# Altium PCB fpga_v3.PcbDoc (part 3 of 3)
Units mm, origin at the board's own origin, x right, y up, seen from the top; angles counter-clockwise.
Board outline 160 x 147 mm, 2 copper layers (Top Layer, Bottom Layer); 241 components, 277 nets, 981 pads, 212 vias.
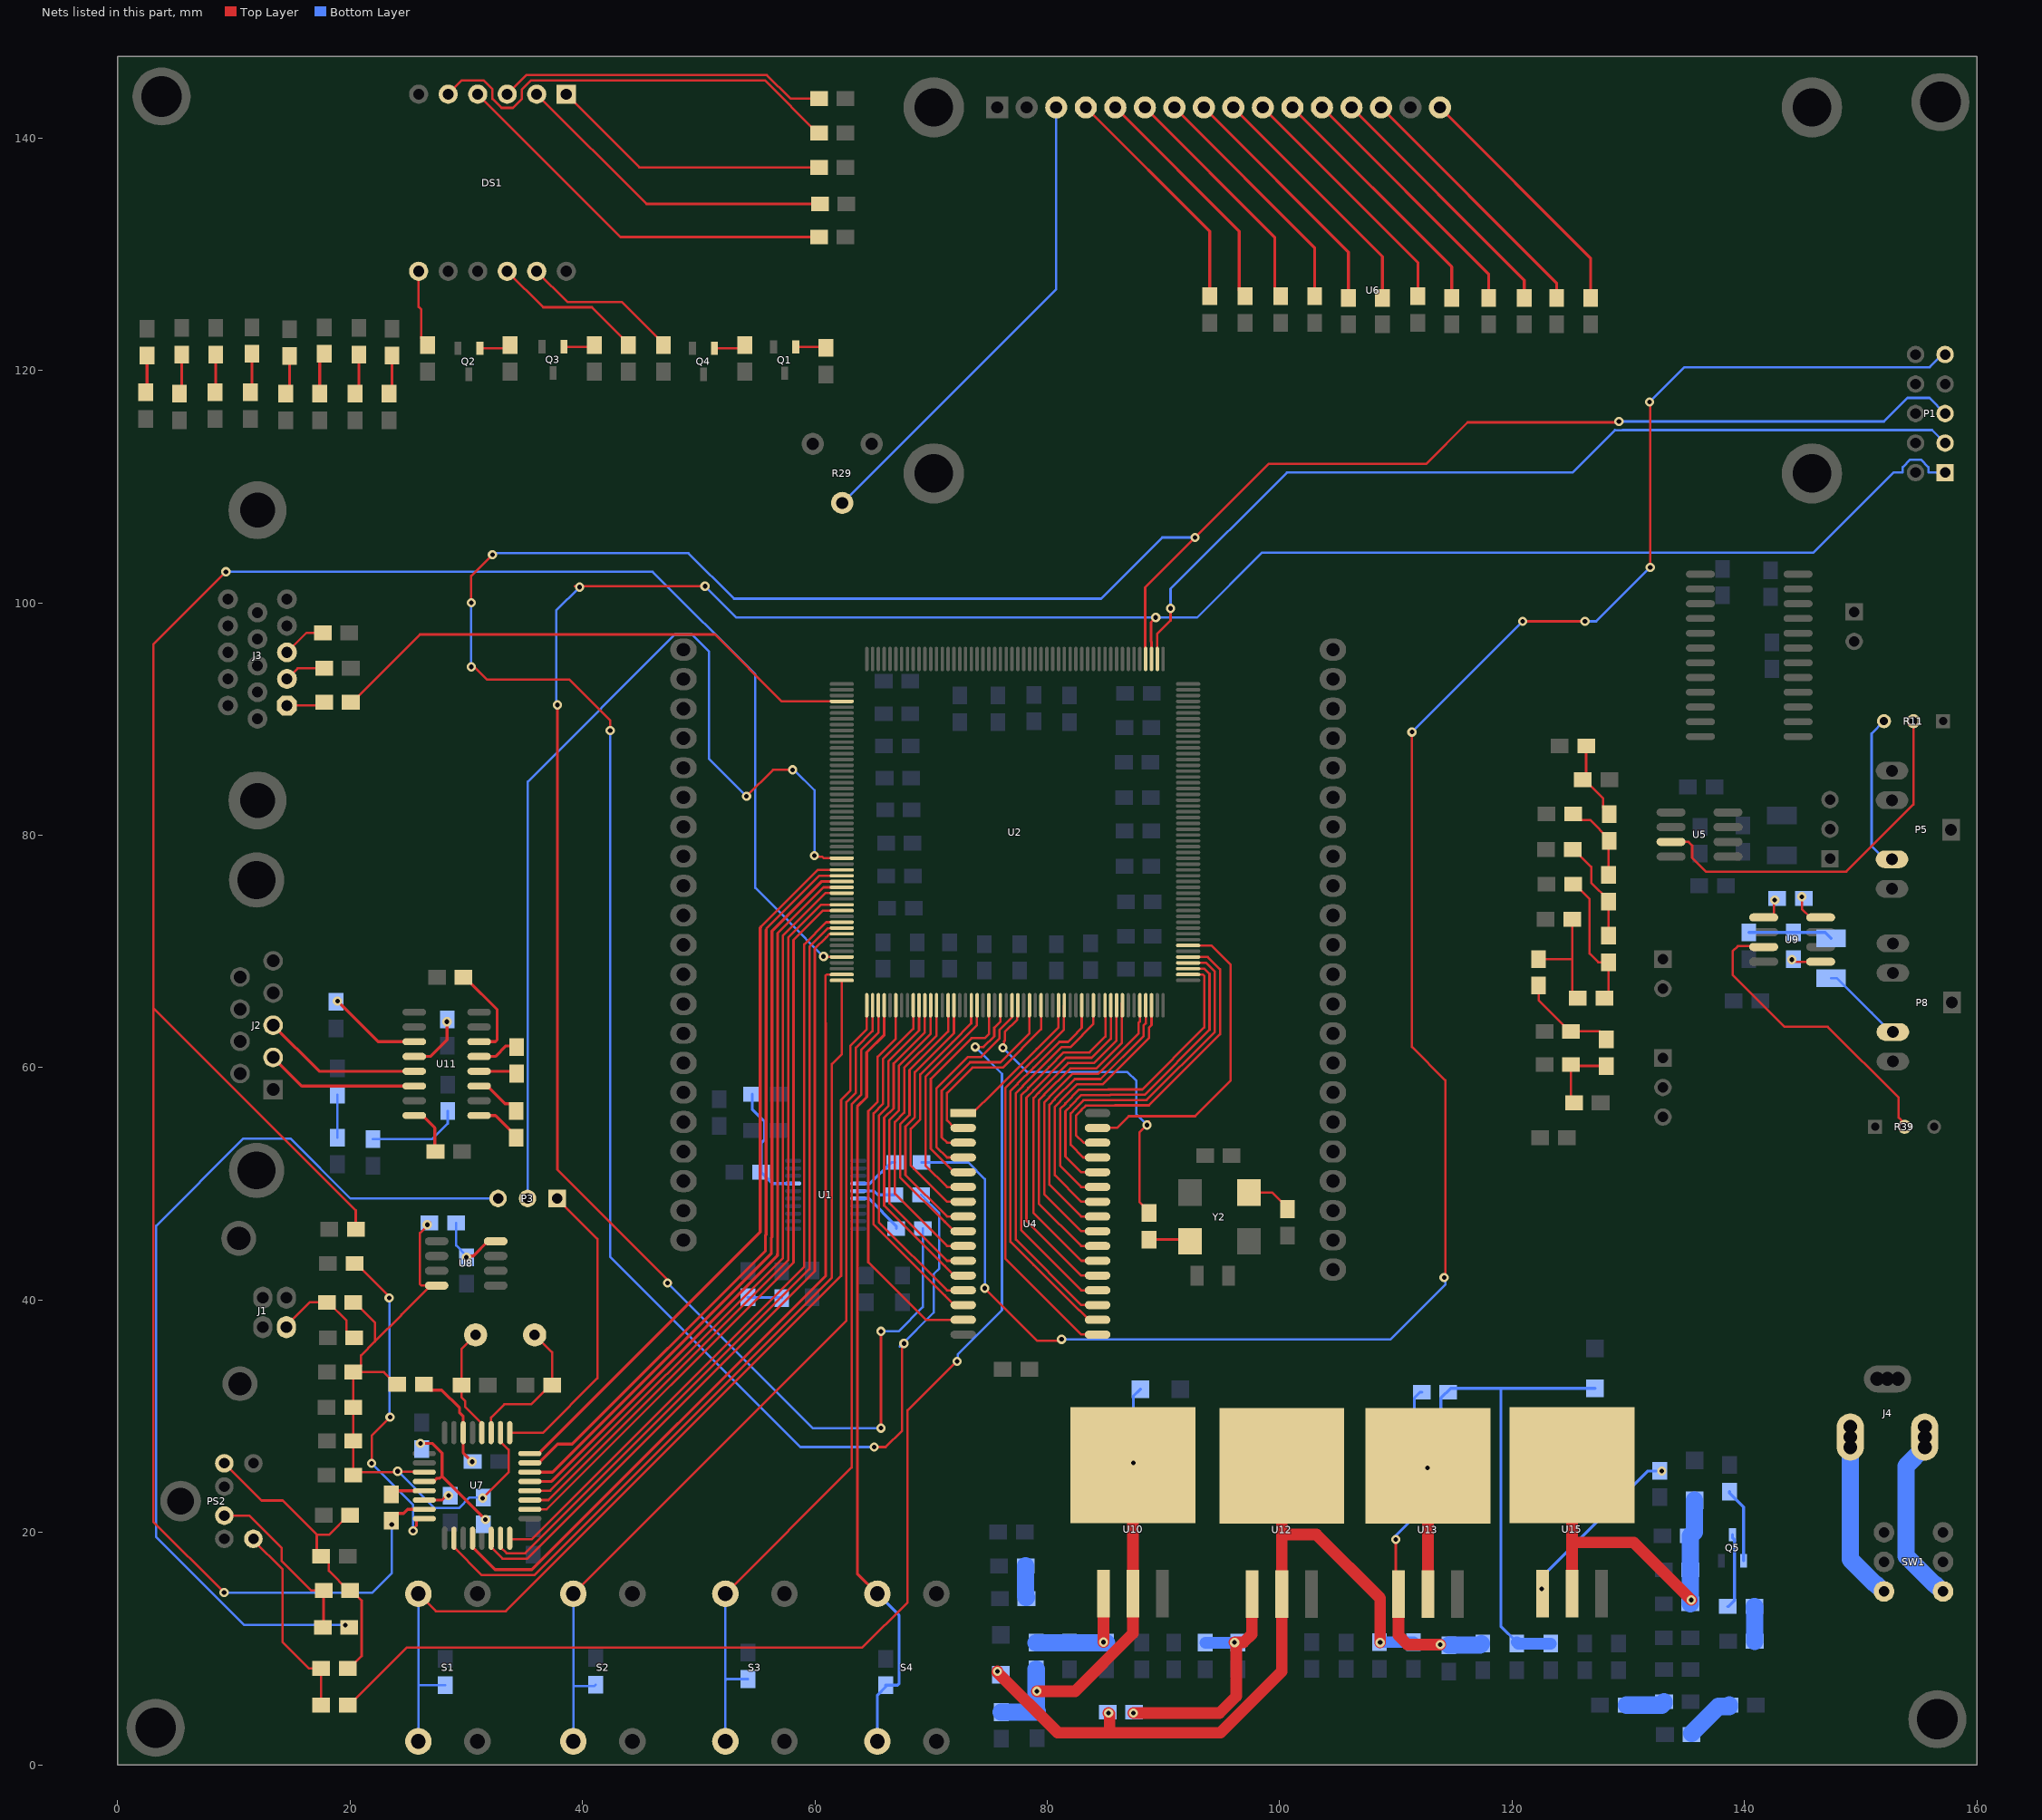
[diagram p3: the nets of this part, all layers, seen from the top]

## Via types
v1: diameter 0.8, hole 0.4, Top Layer to Bottom Layer, 210 vias
v2: diameter 1.27, hole 0.711, Top Layer to Bottom Layer, 2 vias

## Nets (pads, with @x,y where several pads share a name; then routed paths per layer and width w, separated by ;. In a path a pad name is that pad's centre, name@x,y a point inside that pad or via, vN(x,y) a via of type N, cw(c..) or ccw(c..) an arc to the next point about the centre after c; other vN are vias at no path point) (continued)
NetC29_2: C29.2 U7.6 | length 2.2
  Top Layer w0.254: U7.6@26.391,22.795 27.931,22.795 28.327,23.191 v1(28.474,23.191)
NetC30_1: C30.1 J1.1 L2.1 | length 8.6
  Top Layer w0.203: J1.1@14.529,37.668 14.529,37.795 16.535,39.802 18.136,39.802 19.71,38.227 19.71,37.287 20.244,36.754 C30.1@20.371,36.754
NetC31_2: C31.2 U7.27 Y1.2 | length 12.6
  Top Layer w0.203: U7.27@32.145,28.599 32.145,29.904 33.271,31.03 35.602,31.03 37.262,32.69 C31.2@37.389,32.69 37.389,35.509 Y1.2@35.89,37.008
NetC35_1: C35.1 U9.5 | length 2.5
  Top Layer w0.203: v1(144.069,69.291) 144.23,69.291 144.408,69.113 U9.5@146.544,69.113
NetC35_2: C35.2 C36.1 R38.2 | length 7.3
  Bottom Layer w0.254: R38.2@140.36,71.628 146.939,71.628 C36.1@147.447,71.12
NetC36_2: C36.2 P8.4 | length 7.2
  Bottom Layer w0.203: C36.2@147.447,67.691 147.955,67.691 150.927,64.719 152.578,63.068 P8.4@152.756,63.068
NetC37_2: C37.2 U7.28 Y1.1 | length 9.6
  Top Layer w0.203: Y1.1@30.81,37.008 29.591,35.789 29.591,31.642 29.91,31.323 29.91,30.809 31.345,29.374 U7.28@31.345,28.599
NetC38_1: C38.1 U9.1 | length 2.1
  Top Layer w0.203: U9.1@141.644,72.923 142.29,72.923 142.519,73.153 v1@142.519,74.32
  other v1: 142.596,74.422
NetC38_2: C38.2 U9.8 | length 3.2
  Top Layer w0.203: v1@144.932,74.879 144.932,73.635 145.644,72.923 U9.8@146.544,72.923
  other v1: 144.932,74.707
NetC39_1: C39.1 R40.1 U7.30 | length 9
  Top Layer w0.254: R40.1@26.365,32.766 26.873,32.258 27.888,32.258 29.427,30.718 29.427,30.298 29.745,29.98 29.745,26.846 v1(30.505,26.086)
NetC43_1: C43.1 C44.1 L5.1 R61.1 U10.2 | length 38.3
  Top Layer w1: v1(79.1,6.35) 82.393,6.35 87.376,11.333 U10.2@87.376,14.757 U10.2@87.376,25.792
  Bottom Layer w0.254: v1@87.401,25.73 v1(87.401,25.984) 87.401,31.725 L5.1@88.011,32.334
  Bottom Layer w1.5: C44.1@76.048,4.547 78.967,4.547 C43.1@79.006,4.585 ; R61.1@79.045,8.23 79.045,4.609 79.057,4.597 C43.1@79.121,4.597
NetC45_1: C45.1 R61.2 R63.2 U10.1 | length 10.3
  Top Layer w0.203: v1@84.811,10.541 v1(84.836,10.566)
  Top Layer w1: v1(84.836,10.566) U10.1@84.836,14.757
  Bottom Layer w1.5: R61.2@79.045,10.516 C45.1@85.09,10.516
NetC46_1: C46.1 U11.16 | length 4.3
  Top Layer w0.254: U11.16@25.527,55.88 26.238,55.88 27.305,54.813 C46.1@27.305,52.781
NetC47_1: C47.1 U11.1 | length 4.2
  Top Layer w0.254: U11.1@31.115,55.88 32.512,55.88 34.468,53.924 C47.1@34.468,53.899
NetC47_2: C47.2 U11.3 | length 4.2
  Top Layer w0.254: U11.3@31.115,58.42 31.826,58.42 33.35,56.896 33.782,56.896 34.29,56.388 C47.2@34.29,56.236
NetC48_1: C48.1 U11.4 | length 2.9
  Top Layer w0.254: U11.4@31.115,59.69 C48.1@34.061,59.69
NetC48_2: C48.2 U11.5 | length 3.2
  Top Layer w0.254: U11.5@31.115,60.96 32.512,60.96 33.426,61.874 C48.2@33.985,61.874
NetC51_1: C51.1 C52.1 L6.1 R77.1 U12.2 | length 65.9
  Top Layer w0.254: U12.2@100.178,21.996 U12.2@100.178,25.742
  Top Layer w1: v1(75.717,8.052) 75.717,7.959 80.908,2.769 85.357,2.769 ; v1(85.274,4.464) 85.357,4.381 85.357,2.769 ; U12.2@100.178,21.996 100.178,20.015 ; v1(108.636,10.541) 108.636,14.351 103.149,19.837 100.355,19.837 100.178,20.015 ; 85.357,2.769 94.885,2.769 100.178,8.061 U12.2@100.178,14.707 100.178,20.015
  Bottom Layer w0.203: C51.1@108.585,10.566 C51.1@108.661,10.566
  Bottom Layer w1: v1(108.636,10.541) 108.661,10.566 C52.1@111.506,10.566
NetC53_1: C53.1 R77.2 R80.2 U12.1 | length 22.2
  Top Layer w1: v1(87.401,4.47) 94.814,4.47 96.25,5.907 96.25,10.405 v1(96.114,10.541) 96.876,10.541 97.598,11.263 97.598,14.667 U12.1@97.638,14.707
  Bottom Layer w0.203: v1(96.114,10.541) 96.139,10.516 R80.2@96.393,10.516
  Bottom Layer w1: C53.1@93.599,10.516 96.088,10.516 v1(96.114,10.541)
NetC54_2: C54.2 U11.6 | length 7.9
  Top Layer w0.254: C54.2@30.074,67.589 32.661,65.002 32.661,62.379 32.512,62.23 U11.6@31.115,62.23
NetC58_1: C58.1 C59.1 L7.1 R84.1 U13.2 | length 56.6
  Top Layer w0.254: U13.2@112.751,25.527 U13.2@112.751,25.742
  Top Layer w1: v1(112.725,25.552) 112.751,25.527 U13.2@112.751,14.707
  Bottom Layer w0.254: v1(112.725,25.552) 113.868,26.695 113.868,31.572 114.706,32.41 119.024,32.41 ; C59.1@120.396,10.566 119.024,11.938 119.024,32.41 ; L7.1@127.127,32.41 119.024,32.41
  Bottom Layer w1: C59.1@120.396,10.566 120.523,10.439 C58.1@123.317,10.439
NetC62_1: C62.1 R84.2 R88.2 U13.1 | length 29.1
  Top Layer w0.203: v1@110.084,19.66 v1@110.211,19.533
  Top Layer w0.254: U13.1@110.211,14.935 109.982,15.164 109.982,19.304 v1@110.211,19.533 ; v1(113.817,10.363) v1@114.173,10.363
  Top Layer w1: U13.1@110.211,14.707 110.211,11.151 110.998,10.363 v1(113.817,10.363)
  Bottom Layer w0.254: v1@109.906,19.66 111.582,21.336 111.582,31.572 112.09,32.08 R84.2@112.217,32.08
  Bottom Layer w1.5: C62.1@114.554,10.312 117.245,10.312 R88.2@117.36,10.427
  other v1: 109.982,19.406
NetC70_1: C70.1 C71.1 L9.1 R102.1 U15.2 | length 32.4
  Top Layer w1: U15.2@125.146,14.757 125.146,19.152 ; U15.2@125.146,25.792 125.146,19.152 ; v1(135.407,14.199) 130.454,19.152 125.146,19.152
  Bottom Layer w1.5: R102.1@135.331,13.868 C70.1@135.331,16.789 135.331,19.71 135.675,20.054 135.675,22.772 L9.1@135.687,22.784
NetD1_1: D1.1 R9.1 | length 2.9
  Bottom Layer w0.254: D1.1@54.241,40.234 57.099,40.234 R9.1@57.15,40.183
NetD2_2: D2.2 R62.2 | length 3.4
  Bottom Layer w1.5: R62.2@129.845,5.156 132.882,5.156 133.071,5.345 D2.2@133.071,5.448
NetD3_1: D3.1 R66.2 | length 3.2
  Top Layer w0.254: R66.2@2.413,118.11 2.54,118.237 D3.1@2.54,121.285
NetD4_1: D4.1 R67.2 | length 3.5
  Top Layer w0.254: R67.2@5.334,117.983 5.525,118.174 D4.1@5.525,121.361
NetD5_1: D5.1 R68.2 | length 3.3
  Top Layer w0.254: R68.2@8.382,118.11 8.446,118.174 D5.1@8.446,121.361
NetD6_1: D6.1 R69.2 | length 3.4
  Top Layer w0.254: R69.2@11.43,118.11 11.557,118.237 D6.1@11.557,121.412
NetD7_1: D7.1 R70.2 | length 3.4
  Top Layer w0.254: R70.2@14.478,117.983 14.796,118.301 D7.1@14.796,121.234
NetD8_1: D8.1 R71.2 | length 3.6
  Top Layer w0.254: R71.2@17.399,117.983 17.399,121.031 D8.1@17.78,121.412
NetD9_1: D9.1 R72.2 | length 3.5
  Top Layer w0.254: R72.2@20.447,117.983 20.765,118.301 D9.1@20.765,121.361
NetD10_1: D10.1 R73.2 | length 3.4
  Top Layer w0.254: R73.2@23.368,117.983 23.622,118.237 D10.1@23.622,121.285
NetD11_2: D11.2 R78.2 | length 2.7
  Bottom Layer w1.5: R78.2@78.13,17.12 78.13,14.492 D11.2@78.195,14.428
NetD13_2: D13.2 R85.2 | length 4.3
  Bottom Layer w1.5: R85.2@135.445,2.731 137.742,5.028 138.672,5.028 138.684,5.04 D13.2@138.684,5.143
NetD14_1: D14.1 R92.2 | length 3.7
  Bottom Layer w0.203: R92.2@18.923,53.975 D14.1@18.923,57.658
NetD15_1: D15.1 R96.2 | length 8.1
  Bottom Layer w0.203: R96.2@21.971,53.848 27.063,53.848 28.41,55.194 D15.1@28.41,56.261
NetD17_2: D17.2 R104.1 | length 3
  Bottom Layer w1.5: R104.1@140.843,13.64 140.855,13.628 140.855,13.501 140.868,13.487 D17.2@140.868,10.656
NetDS1_1: DS1.1 R56.1 | length 24.4
  Top Layer w0.203: DS1.1@38.608,143.764 44.907,137.465 R56.1@60.35,137.465
NetDS1_2: DS1.2 R55.1 | length 28.3
  Top Layer w0.203: DS1.2@36.068,143.764 45.517,134.315 R55.1@60.427,134.315
NetDS1_3: DS1.3 R59.1 | length 28.3
  Top Layer w0.203: DS1.3@33.528,143.764 35.166,145.402 55.879,145.402 57.898,143.383 R59.1@60.35,143.383
NetDS1_4: DS1.4 R54.1 | length 34.5
  Top Layer w0.203: DS1.4@30.988,143.764 43.282,131.47 R54.1@60.35,131.47
NetDS1_5: DS1.5 R58.1 | length 37.2
  Top Layer w0.203: DS1.5@28.448,143.764 29.629,144.945 31.477,144.945 32.258,144.164 32.258,143.364 33.039,142.583 34.017,142.583 34.798,143.364 34.798,144.164 35.579,144.945 55.689,144.945 60.223,140.411 R58.1@60.35,140.411
NetDS1_7: DS1.7 R53.1 | length 6.7
  Top Layer w0.203: DS1.7@25.908,128.524 25.908,125.459 26.137,125.231 26.137,122.707 R53.1@26.67,122.174
NetDS1_10: DS1.10 R57.1 | length 13.1
  Top Layer w0.203: DS1.10@33.528,128.524 36.627,125.425 40.818,125.425 43.942,122.301 R57.1@43.942,122.174
NetDS1_11: DS1.11 R51.1 | length 13.6
  Top Layer w0.203: DS1.11@36.068,128.524 38.71,125.882 43.383,125.882 46.965,122.301 R51.1@46.965,122.174
NetJ3_1: J3.1 R76.2 | length 3.3
  Top Layer w0.203: J3.1@14.58,91.161 17.501,91.161 R76.2@17.78,91.44
NetJ3_2: J3.2 R75.2 | length 3.6
  Top Layer w0.203: J3.2@14.58,93.447 15.494,94.361 R75.2@17.78,94.361
NetJ3_3: J3.3 R65.2 | length 3.8
  Top Layer w0.203: J3.3@14.58,95.733 16.256,97.409 R65.2@17.653,97.409
NetJ4_1: J4.1 SW1.2 | length 14.6
  Bottom Layer w1.5: J4.1@149.098,28.219 149.098,17.694 151.209,15.582 151.271,15.582 151.918,14.935 SW1.2@151.994,14.935
NetJ4_3: J4.3 SW1.1 | length 15.4
  Bottom Layer w1.5: J4.3@155.499,28.219 J4.3@155.499,27.33 153.887,25.718 153.887,17.985 156.289,15.582 156.351,15.582 156.998,14.935 SW1.1@157.074,14.935
NetP3_2: P3.2 U2.31 | length 86.7
  Top Layer w0.203: v1(54.119,83.346) 56.398,85.624 v1(58.089,85.624) ; v1(59.962,78.248) 60.076,78.133 60.649,78.133 60.768,78.014 U2.31@62.316,78.014
  Bottom Layer w0.203: P3.2@35.281,48.743 35.306,48.768 35.306,84.616 47.959,97.269 49.424,97.269 50.883,95.811 50.883,86.582 v1(54.119,83.346) ; v1(58.089,85.624) 58.166,85.547 58.293,85.547 59.962,83.878 v1(59.962,78.248)
NetP5_4: P5.4 R11.3 | length 13.4
  Bottom Layer w0.203: R11.3@151.994,89.814 150.927,88.748 150.927,79.045 152.044,77.927 P5.4@152.679,77.927
NetPS2_1: PS2.1 R94.2 R97.2 | length 15.1
  Top Layer w0.203: PS2.1@9.186,21.458 11.32,21.458 14.125,18.653 14.125,17.549 16.662,15.011 R97.2@17.729,15.011 17.729,11.913 R94.2@17.653,11.836
NetPS2_5: PS2.5 R89.2 R91.2 | length 17.3
  Top Layer w0.203: PS2.5@11.686,19.458 11.686,19.342 14.206,16.821 14.206,10.559 16.459,8.306 R89.2@17.526,8.306 R91.2@17.526,5.156
NetQ1_2: Q1.3 R52.1 | length 2.6
  Top Layer w0.203: Q1.3@58.354,122.011 60.869,122.011 R52.1@60.96,121.92
NetQ2_2: Q2.3 R60.1 | length 2.7
  Top Layer w0.203: Q2.3@31.176,121.902 33.51,121.902 R60.1@33.782,122.174
NetQ3_2: Q3.3 R64.1 | length 2.7
  Top Layer w0.203: Q3.3@38.415,122.029 40.876,122.029 R64.1@41.021,122.174
NetQ4_2: Q4.3 R74.1 | length 2.7
  Top Layer w0.203: Q4.3@51.369,121.902 53.703,121.902 R74.1@53.975,122.174
NetQ5_1: Q5.1 R104.2 | length 6.5
  Bottom Layer w0.254: R104.2@138.557,13.64 138.633,13.64 139.141,14.148 139.141,19.367 138.963,19.544 Q5.1@138.963,19.819
NetQ5_3: Q5.3 R98.2 | length 6.4
  Bottom Layer w0.254: R98.2@138.709,23.52 138.709,23.393 139.913,22.189 Q5.3@139.913,17.569
NetR4_1: R4.1 U1.4 | length 3.9
  Bottom Layer w0.254: U1.4@63.729,50.037 64.743,50.037 66.548,51.841 R4.1@66.904,51.841
NetR5_1: R5.1 U1.6 | length 4.5
  Bottom Layer w0.254: U1.6@63.729,48.737 64.649,48.737 67.005,46.38 R5.1@67.005,46.152
NetR6_1: R6.1 U1.5 | length 3.3
  Bottom Layer w0.254: U1.5@63.729,49.387 65.079,49.387 65.418,49.047 R6.1@66.853,49.047
NetR7_1: R7.1 R8.2 U1.17 | length 10.4
  Bottom Layer w0.254: R7.1@54.61,57.709 54.61,56.419 55.489,55.54 55.674,55.355 55.674,53.814 55.482,53.623 55.451,53.623 55.372,53.543 R8.2@55.372,51.003 56.338,50.037 U1.17@58.129,50.037
NetR11_2: R11.2 U5.3 | length 32.1
  Top Layer w0.203: U5.3@133.669,79.426 135.179,79.426 135.49,79.115 135.49,78.046 136.664,76.872 148.76,76.872 154.534,82.646 R11.2@154.534,89.814
NetR12_2: R12.2 R13.1 R20.2 | length 6.5
  Top Layer w0.203: R12.2@125.324,56.972 125.07,57.226 R20.2@125.07,60.274 125.197,60.147 R13.1@128.092,60.147
NetR13_2: R13.2 R14.1 R21.2 | length 8.5
  Top Layer w0.203: R14.1@122.276,67.056 122.276,65.786 124.943,63.119 127.533,63.119 128.092,62.56 R13.2@128.092,62.433
NetR14_2: R14.2 R15.1 R22.2 | length 9.9
  Top Layer w0.203: R14.2@122.276,69.342 125.171,69.342 ; R22.2@125.171,72.771 125.171,69.342 ; R15.1@125.654,65.989 125.171,66.472 125.171,69.342
NetR15_2: R15.2 R16.1 R23.2 | length 11.8
  Top Layer w0.203: R23.2@125.247,75.794 125.374,75.794 126.657,74.511 126.657,69.812 127.406,69.063 R16.1@128.295,69.063 128.295,66.345 R15.2@127.94,65.989
NetR16_2: R16.2 R17.1 R24.2 | length 8.8
  Top Layer w0.203: R24.2@125.197,78.765 125.324,78.765 126.809,77.279 126.809,75.908 128.295,74.422 R16.2@128.295,71.349
NetR17_2: R17.2 R18.1 R25.2 | length 7.1
  Top Layer w0.203: R25.2@125.247,81.839 125.781,81.305 126.695,81.305 128.346,79.654 R18.1@128.346,79.527 128.295,79.477 R17.2@128.295,76.581
NetR18_2: R18.2 R26.2 R27.2 | length 6.9
  Top Layer w0.203: R26.2@126.086,84.785 126.213,84.785 127.813,83.185 127.813,82.347 R18.2@128.346,81.813 ; R26.2@126.149,84.849 126.365,85.065 R27.2@126.365,87.681
NetR28_2: R28.2 U7.8 | length 28.3
  Top Layer w0.203: R28.2@20.396,43.155 20.523,43.155 23.368,40.31 v1(23.368,40.183) ; v1(21.868,25.951) 21.868,28.345 v1(23.444,29.921) ; v1(25.425,20.142) 25.425,20.304 25.717,20.596 25.717,21.081 25.831,21.195 U7.8@26.391,21.195
  Bottom Layer w0.203: v1(21.868,25.951) 25.425,22.394 v1(25.425,20.142) ; v1(23.368,40.183) 23.406,40.145 23.406,29.959 v1(23.444,29.921)
NetR29_3: R29.3 U6.3 | length 41.7
  Bottom Layer w0.203: R29.3@62.357,108.585 62.385,108.585 80.772,126.972 U6.3@80.772,142.621
NetR31_2: R31.2 U7.5 | length 3
  Top Layer w0.254: R31.2@23.546,23.292 23.849,23.595 U7.5@26.391,23.595
NetR32_2: R32.2 R34.2 U7.4 | length 11.2
  Top Layer w0.254: v1(26.06,27.674) 27.067,27.674 27.921,26.821 27.921,24.849 ; U7.4@26.391,24.395 27.219,24.395 27.493,24.67 27.741,24.67 27.921,24.849 ; v1(31.656,21.114) 27.921,24.849
NetR33_2: R33.2 U6.16 | length 21.7
  Top Layer w0.254: U6.16@113.792,142.621 126.746,129.667 R33.2@126.746,126.238
NetR35_2: R35.2 U6.4 | length 20.7
  Top Layer w0.254: U6.4@83.312,142.621 93.98,131.953 R35.2@93.98,126.365
NetR36_2: R36.2 U6.5 | length 20.9
  Top Layer w0.254: U6.5@85.852,142.621 96.52,131.953 96.52,126.873 R36.2@97.028,126.365
NetR37_2: R37.2 U6.6 | length 21.1
  Top Layer w0.254: U6.6@88.392,142.621 99.568,131.445 99.568,126.873 R37.2@100.076,126.365
NetR39_2: R39.2 U9.3 | length 26.3
  Top Layer w0.203: U9.3@141.644,70.383 141.376,70.383 141.307,70.453 139.412,70.453 138.97,70.011 138.97,67.989 143.45,63.509 147.158,63.509 153.264,57.404 153.264,55.686 153.772,55.178 R39.2@153.772,54.915
NetR41_2: R41.2 U6.7 | length 21.3
  Top Layer w0.254: U6.7@90.932,142.621 102.997,130.556 R41.2@102.997,126.365
NetR42_2: R42.2 U6.8 | length 21.5
  Top Layer w0.254: U6.8@93.472,142.621 105.918,130.175 R42.2@105.918,126.238
NetR43_1: R43.1 R47.1 U8.4 | length 6.2
  Top Layer w0.254: v1@30.201,43.718 30.275,43.792 30.61,43.792 31.877,45.06 U8.4@32.537,45.06
  Bottom Layer w0.203: R47.1@29.134,46.634 29.134,44.704 30.023,43.815 v1(30.023,43.688)
NetR44_2: R44.2 U6.9 | length 21.7
  Top Layer w0.254: U6.9@96.012,142.621 108.839,129.794 R44.2@108.839,126.238
NetR45_2: R45.2 U6.10 | length 21.8
  Top Layer w0.254: U6.10@98.552,142.621 111.887,129.286 R45.2@111.887,126.365
NetR46_2: R46.2 U6.11 | length 22.1
  Top Layer w0.254: U6.11@101.092,142.621 114.808,128.905 R46.2@114.808,126.238
NetR48_2: R48.2 U6.12 | length 22.3
  Top Layer w0.254: U6.12@103.632,142.621 117.983,128.27 R48.2@117.983,126.238
NetR49_2: R49.2 U6.13 | length 22.5
  Top Layer w0.254: U6.13@106.172,142.621 121.031,127.762 R49.2@121.031,126.238
NetR50_2: R50.2 U6.14 | length 22.6
  Top Layer w0.254: U6.14@108.712,142.621 123.825,127.508 R50.2@123.825,126.238
NetR79_2: R79.2 U11.11 | length 8.1
  Top Layer w0.254: v1(18.923,65.735) 22.428,62.23 U11.11@25.527,62.23
NetR81_2: R81.2 U11.12 | length 5
  Top Layer w0.254: U11.12@25.527,60.96 26.924,60.96 28.346,62.382 v1(28.346,63.957)
NetR83_2: R83.2 Y2.3 | length 3.6
  Top Layer w0.203: R83.2@88.748,45.212 92.121,45.212 Y2.3@92.274,45.06
NetR93_1: R93.1 Y2.1 | length 4
  Top Layer w0.203: Y2.1@97.354,49.251 99.365,49.251 100.66,47.955 R93.1@100.66,47.828
NetR103_2: R103.2 U15.1 | length 15.1
  Bottom Layer w0.254: v1(122.555,15.138) 122.555,16.18 131.674,25.298 v1(132.867,25.298)
PC_RX: J2.2 U11.14 | length 13.2
  Top Layer w0.254: J2.2@13.384,60.882 15.846,58.42 U11.14@25.527,58.42
PC_TX: J2.3 U11.13 | length 13.8
  Top Layer w0.254: J2.3@13.384,63.652 17.346,59.69 U11.13@25.527,59.69
PS2_CLK: R91.1 U2.76 | length 108.9
  Top Layer w0.203: R91.1@19.812,5.156 19.939,5.156 24.893,10.11 64.085,10.11 67.97,13.995 67.97,30.514 72.184,34.728 v1(72.231,34.728) ; v1(73.791,61.775) 73.795,61.779 74.515,61.779 75.436,62.7 75.436,63.442 75.966,63.972 U2.76@75.966,65.364
  Bottom Layer w0.203: v1(72.231,34.728) 72.298,34.795 72.298,35.341 76.098,39.141 76.098,59.468 v1(73.791,61.775)
PS2_DATA: P3.3 R94.1 | length 80.9
  Bottom Layer w0.203: v1(19.609,12.04) 10.895,12.04 3.33,19.604 3.33,46.392 10.831,53.893 14.895,53.893 20.046,48.743 P3.3@32.741,48.743
PS2_VCC: PS2.4 R82.2 R86.2 R89.1 R97.1 | length 28
  Top Layer w0.203: PS2.4@9.186,25.958 12.386,22.758 14.212,22.758 17.145,19.825 ; R89.1@19.812,8.306 19.939,8.306 21.003,9.369 21.003,14.151 20.142,15.011 19.888,15.011 18.186,16.713 18.186,17.424 17.653,17.958 R82.2@17.526,17.958 17.145,18.339 17.145,19.825 ; R86.2@20.015,21.488 19.888,21.488 18.224,19.825 17.145,19.825
PWREN: U2.52 U7.10 | length 70.8
  Top Layer w0.203: U7.10@28.945,19.517 28.945,18.742 31.351,16.336 35.857,16.336 61.468,41.947 61.468,60.325 62.316,61.173 U2.52@62.316,67.514
RAM-A0: U2.63 U4.12 | length 28
  Top Layer w0.203: U2.63@69.466,65.364 69.466,63.053 66.777,60.363 66.777,56.503 65.964,55.69 65.964,48.136 71.174,42.926 71.205,42.926 72.018,42.113 U4.12@72.768,42.113
RAM-A1: U2.64 U4.11 | length 26.9
  Top Layer w0.203: U2.64@69.966,65.364 69.966,62.906 67.234,60.174 67.234,56.314 66.421,55.501 66.421,48.325 71.363,43.383 U4.11@72.768,43.383
RAM-A2: U2.65 U4.10 | length 25.5
  Top Layer w0.203: U2.65@70.466,65.364 70.466,62.76 67.691,59.985 67.691,56.124 66.878,55.311 66.878,49.138 71.363,44.653 U4.10@72.768,44.653
RAM-A3: U2.67 U4.9 | length 23.9
  Top Layer w0.203: U2.67@71.466,65.364 71.466,63.113 68.148,59.795 68.148,55.935 67.335,55.122 67.335,50.574 71.174,46.736 71.205,46.736 72.018,45.923 U4.9@72.768,45.923
RAM-A4: U2.68 U4.8 | length 22.8
  Top Layer w0.203: U2.68@71.966,65.364 71.966,62.967 68.605,59.606 68.605,55.745 67.793,54.933 67.793,50.764 71.363,47.193 U4.8@72.768,47.193
RAM-A5: U2.71 U4.7 | length 21.8
  Top Layer w0.203: U4.7@72.768,48.463 71.363,48.463 68.25,51.577 68.25,54.743 69.063,55.556 69.063,59.417 71.838,62.192 73.447,63.801 73.447,65.345 U2.71@73.466,65.364
RAM-A6: U2.72 U4.6 | length 19.6
  Top Layer w0.203: U4.6@72.768,49.733 71.363,49.733 69.52,51.577 69.52,59.227 72.295,62.002 73.947,63.655 73.947,65.345 U2.72@73.966,65.364
RAM-A7: U2.74 U4.5 | length 18.7
  Top Layer w0.203: U4.5@72.768,51.003 72.018,51.003 71.205,51.816 71.174,51.816 69.977,53.013 69.977,59.03 73.482,62.535 74.624,62.535 74.979,62.89 74.979,65.351 U2.74@74.966,65.364
RAM-A8: U2.106 U4.27 | length 30.1
  Top Layer w0.203: U4.27@84.328,49.733 82.923,49.733 81.102,51.554 81.102,56.436 81.555,56.889 81.555,56.921 82.74,58.106 85.22,58.106 85.239,58.126 88.174,58.126 93.497,63.449 93.497,67.895 93.378,68.014 U2.106@92.116,68.014
RAM-A9: U2.102 U4.26 | length 24
  Top Layer w0.203: U4.26@84.328,48.463 82.923,48.463 80.645,50.741 80.645,56.626 81.098,57.078 81.098,57.111 82.551,58.564 84.77,58.564 88.757,62.551 88.757,63.46 88.966,63.668 U2.102@88.966,65.364
RAM-A10: U2.97 U4.23 | length 28.1
  Top Layer w0.203: U4.23@84.328,44.653 82.923,44.653 79.273,48.303 79.273,57.194 79.726,57.646 79.726,57.679 81.982,59.935 84.202,59.935 86.418,62.151 U2.97@86.418,65.557
RAM-A11: U2.101 U4.25 | length 25.4
  Top Layer w0.203: U4.25@84.328,47.193 82.923,47.193 80.188,49.929 80.188,56.815 80.64,57.268 80.64,57.3 82.361,59.021 84.58,59.021 88.3,62.741 88.3,63.649 88.466,63.815 U2.101@88.466,65.364
RAM-A12: U2.78 U4.4 | length 18.2
  Top Layer w0.203: U4.4@72.768,52.273 71.363,52.273 70.452,53.184 70.452,58.207 73.168,60.923 74.305,60.923 75.893,62.511 75.893,63.253 76.947,64.307 76.947,65.345 U2.78@76.966,65.364
RAM-A13: U2.107 U4.28 | length 29.4
  Top Layer w0.203: U4.28@84.328,51.003 82.923,51.003 81.559,52.367 81.559,56.247 82.012,56.699 82.012,56.732 82.929,57.649 84.762,57.649 85.409,57.649 85.429,57.669 86.103,57.669 86.484,57.669 87.74,57.669 88.364,57.669 93.955,63.26 93.955,63.895 93.955,65.139 93.955,65.52 93.955,66.842 93.955,68.084 93.525,68.514 U2.107@92.116,68.514
RAM-A14: U2.81 U4.3 | length 18.1
  Top Layer w0.203: U4.3@72.768,53.543 71.363,53.543 70.909,53.997 70.909,56.748 70.909,58.018 73.357,60.466 74.627,60.466 75.985,60.466 78.466,62.947 U2.81@78.466,65.364
RAM-A15: U2.111 U4.31 | length 27.5
  Top Layer w0.203: U4.31@84.328,54.813 86.003,54.813 87.011,55.82 92.717,55.82 95.783,58.886 95.783,68.842 94.111,70.514 U2.111@92.116,70.514
RAM-A16: U2.83 U4.2 | length 16.5
  Top Layer w0.203: U4.2@72.768,54.813 72.018,54.813 71.366,55.465 71.366,57.828 73.547,60.009 76.175,60.009 79.466,63.3 U2.83@79.466,65.364
RAM-A17: U2.86 U4.1 | length 13.2
  Top Layer w0.203: U4.1@72.768,56.083 73.584,56.083 75.446,57.945 79.104,61.603 80.966,63.465 U2.86@80.966,65.364
RAM-A18: U2.109 U4.30 | length 27.9
  Top Layer w0.203: U4.30@84.328,53.543 83.134,53.543 82.474,54.204 82.474,55.868 82.926,56.321 82.926,56.353 83.308,56.735 85.141,56.735 85.788,56.735 85.808,56.755 86.482,56.755 86.863,56.755 88.119,56.755 88.742,56.755 94.869,62.881 94.869,63.516 94.869,64.761 94.869,65.142 94.869,66.463 94.869,68.463 93.818,69.514 U2.109@92.116,69.514
RAM-CS: U2.96 U4.22 | length 29.4
  Top Layer w0.203: U4.22@84.328,43.383 82.923,43.383 78.816,47.49 78.816,57.383 79.269,57.836 79.269,57.868 81.793,60.392 84.012,60.392 85.96,62.341 U2.96@85.96,65.444
RAM-IO0: U2.62 U4.13 | length 29.8
  Top Layer w0.203: U2.62@68.966,65.364 68.966,63.199 66.319,60.553 66.319,56.692 65.507,55.88 65.507,46.7 71.363,40.843 U4.13@72.768,40.843
RAM-IO1: U2.61 U4.14 | length 30.9
  Top Layer w0.203: U2.61@68.466,65.364 68.466,63.346 65.862,60.742 65.862,56.882 65.049,56.069 65.049,46.51 71.174,40.386 71.205,40.386 72.018,39.573 U4.14@72.768,39.573
RAM-IO2: U2.58 U4.15 | length 33.3
  Top Layer w0.203: U2.58@66.966,65.364 66.966,62.493 65.405,60.932 65.405,57.071 64.592,56.258 64.592,43.256 69.545,38.303 U4.15@72.768,38.303
RAM-IO3: U2.87 U4.17 | length 34.6
  Top Layer w0.203: U2.87@81.466,65.364 81.423,65.321 81.423,63.276 76.378,58.231 76.378,43.579 82.923,37.033 U4.17@84.328,37.033
RAM-IO4: U2.90 U4.18 | length 33.6
  Top Layer w0.203: U2.90@82.966,65.364 82.966,63.423 82.568,63.025 82.568,63.01 81.779,62.221 81.036,62.221 78.816,60.002 77.44,58.626 77.44,58.593 76.835,57.988 76.835,45.015 78.816,43.034 82.734,39.116 82.765,39.116 83.578,38.303 U4.18@84.328,38.303
RAM-IO5: U2.92 U4.19 | length 32.7
  Top Layer w0.203: U2.92@83.966,65.364 83.966,63.777 83.025,62.836 83.025,62.821 81.969,61.764 81.225,61.764 77.897,58.436 77.897,58.404 77.292,57.799 77.292,45.204 82.923,39.573 U4.19@84.328,39.573
RAM-IO6: U2.94 U4.20 | length 32.4
  Top Layer w0.203: U4.20@84.328,40.843 82.923,40.843 77.749,46.017 77.749,57.609 78.354,58.214 78.354,58.247 80.156,60.049 81.414,61.307 83.633,61.307 85.009,62.682 85.009,65.321 U2.94@84.966,65.364
RAM-IO7: U2.95 U4.21 | length 30.9
  Top Layer w0.203: U4.21@84.328,42.113 82.923,42.113 78.207,46.83 78.207,57.42 78.812,58.025 78.812,58.057 81.604,60.85 83.468,60.85 83.823,60.85 85.466,62.493 U2.95@85.466,65.364
RAM-OE: U2.100 U4.24 | length 26.9
  Top Layer w0.203: U4.24@84.328,45.923 82.923,45.923 79.731,49.116 79.731,57.004 80.183,57.457 80.183,57.489 82.172,59.478 84.391,59.478 87.843,62.93 87.843,63.838 87.966,63.962 U2.100@87.966,65.364
RAM-WE: U2.108 U4.29 | length 28.6
  Top Layer w0.203: U4.29@84.328,52.273 83.578,52.273 83.097,52.273 82.017,53.354 82.017,56.057 82.469,56.51 82.469,56.542 83.119,57.192 84.951,57.192 85.599,57.192 85.618,57.212 86.292,57.212 86.673,57.212 87.93,57.212 88.553,57.212 94.412,63.07 94.412,63.705 94.412,64.95 94.412,65.331 94.412,66.652 94.412,68.274 93.672,69.014 U2.108@92.116,69.014
RED: R76.1 U2.4 | length 47
  Top Layer w0.203: R76.1@20.066,91.44 20.193,91.44 26.022,97.269 51.399,97.269 57.154,91.514 U2.4@62.316,91.514
RSTOUT: R30.2 R31.1 U2.48 U7.7 | length 219.7
  Top Layer w0.203: v1(9.169,14.834) 3.073,20.93 3.073,65.151 ; v1(9.322,102.667) 3.073,96.418 3.073,65.151 ; R30.2@20.498,46.101 20.498,47.727 3.073,65.151 ; v1(60.75,69.563) 60.781,69.533 62.297,69.533 U2.48@62.316,69.514
  Top Layer w0.254: R31.1@23.546,21.006 23.546,21.133 24.054,21.641 24.612,21.641 24.967,21.995 U7.7@26.391,21.995
  Bottom Layer w0.203: v1(9.169,14.834) 21.922,14.834 23.597,16.508 23.597,20.625 23.52,20.701 v1@23.52,21.057 ; v1(9.322,102.667) 46.038,102.667 54.875,93.83 54.875,75.473 57.715,72.633 57.715,72.598 v1(60.75,69.563)
  other v1: 23.597,20.701
SW0: R87.1 S1.1 S1.3 U2.53 | length 88.1
  Top Layer w0.203: S1.3@25.883,14.732 27.381,13.233 33.401,13.233 62.255,42.088 62.255,57.226 63.068,58.039 63.068,61.899 64.466,63.297 U2.53@64.466,65.364
  Bottom Layer w0.203: S1.1@25.883,2.032 25.883,6.858 ; S1.3@25.883,14.732 25.883,6.858 ; R87.1@28.194,6.858 25.883,6.858
SW1: R90.1 S2.1 S2.3 U2.54 | length 76
  Top Layer w0.203: S2.3@39.218,14.732 62.713,38.227 62.713,57.037 63.525,57.85 63.525,61.71 64.966,63.151 U2.54@64.966,65.364
  Bottom Layer w0.203: S2.1@39.218,2.032 39.218,6.782 ; S2.3@39.218,14.732 39.218,6.782 ; R90.1@41.148,6.909 41.021,6.782 39.218,6.782
SW2: R95.1 S3.1 S3.3 U2.55 | length 70.8
  Top Layer w0.203: S3.3@52.299,14.732 63.17,25.603 63.17,56.847 63.983,57.66 63.983,61.521 65.466,63.004 U2.55@65.466,65.364
  Bottom Layer w0.203: S3.1@52.299,2.032 52.299,7.264 ; S3.3@52.299,14.732 52.299,7.264 ; R95.1@54.254,7.391 52.426,7.391 52.299,7.264
SW3: R99.1 S4.1 S4.3 U2.56 | length 67.2
  Top Layer w0.254: S4.3@65.38,14.732 63.652,16.459 63.652,56.648 64.465,57.46 64.465,61.321 65.966,62.822 U2.56@65.966,65.364
  Bottom Layer w0.254: S4.1@65.38,2.032 65.38,6.02 66.091,6.731 R99.1@66.091,6.858 67.107,6.858 67.256,7.007 67.256,12.856 S4.3@65.38,14.732
SYSCLK: R83.1 U2.79 | length 29.6
  Top Layer w0.203: v1(76.17,61.719) 76.284,61.833 76.284,62.255 76.35,62.322 76.35,63.063 77.418,64.13 77.418,64.389 77.447,64.419 77.447,65.345 U2.79@77.466,65.364 ; v1@88.53,55.065 88.53,55.025 87.927,54.422 87.927,48.446 88.748,47.625 R83.1@88.748,47.498 ; v1(88.57,55.065) 88.57,55.185 v1@88.748,55.363
  Bottom Layer w0.203: v1(76.17,61.719) 78.275,59.614 86.227,59.614 86.25,59.637 86.876,59.637 87.666,58.848 87.666,55.969 v1(88.57,55.065)
TCK: P1.1 R5.2 U2.159 | length 237.5
  Top Layer w0.203: v1(37.846,91.211) 37.846,51.232 v1@47.6,41.478 ; v1@39.37,101.422 v1(50.546,101.422) ; v1(65.684,28.981) v1(65.684,37.313) ; U2.159@88.966,95.164 88.966,96.614 88.929,96.651 88.929,98.327 v1(89.332,98.73)
  Bottom Layer w0.203: v1@37.744,90.932 37.744,99.339 v1(39.751,101.346) ; v1(47.32,41.478) 59.817,28.981 v1(65.684,28.981) ; v1(50.546,101.422) 53.238,98.73 v1(89.332,98.73) 92.886,98.73 98.474,104.318 98.493,104.299 145.916,104.299 152.818,111.201 153.606,111.201 153.606,111.659 154.253,112.307 155.169,112.307 155.817,111.659 155.817,111.201 P1.1@157.251,111.201 ; v1(65.684,37.313) 67.208,37.313 69.291,39.395 R5.2@69.291,46.152
TDI: P1.9 R4.2 | length 175.7
  Top Layer w0.203: v1(74.625,41.021) 79.146,36.5 v1@81.458,36.5 ; v1(111.379,88.875) 111.379,61.773 114.252,58.9 114.252,42.039 v1(114.148,41.935) ; v1(120.904,98.4) v1(126.263,98.4) ; v1@131.775,117.323 v1(131.826,117.272) 131.877,117.221 v1(131.877,103.048)
  Bottom Layer w0.203: R4.2@69.19,51.841 73.203,51.841 74.625,50.419 v1(74.625,41.021) ; v1(81.229,36.627) 109.55,36.627 114.252,41.328 114.252,41.831 v1(114.148,41.935) ; v1(111.379,88.875) v1(120.904,98.4) ; v1(126.263,98.4) 127.229,98.4 v1(131.877,103.048) ; v1(131.826,117.272) 134.823,120.269 154.24,120.269 154.253,120.256 155.169,120.256 155.183,120.269 155.931,120.269 157.023,121.361 P1.9@157.251,121.361
TDO: P1.3 U2.158 | length 79.3
  Top Layer w0.203: U2.158@89.466,95.164 89.466,97.34 90.602,98.476 v1(90.602,99.517)
  Bottom Layer w0.203: v1(90.602,99.517) 90.602,101.194 100.609,111.201 125.195,111.201 128.852,114.859 128.871,114.84 129.497,114.84 129.516,114.859 156.134,114.859 P1.3@157.251,113.741
TMS: P1.5 R6.2 U2.160 | length 272.8
  Top Layer w0.203: v1@30.429,94.742 31.775,93.396 38.862,93.396 42.393,89.865 v1(42.393,89.002) ; v1(30.429,100) 30.429,102.311 v1(32.258,104.14) ; v1(65.1,27.356) 66.091,27.356 67.513,28.778 67.513,36.119 v1(67.666,36.271) ; U2.160@88.466,95.164 88.423,95.207 88.423,101.326 v1(92.71,105.613) 99.043,111.946 112.593,111.946 116.166,115.519 v1@129.464,115.519
  Bottom Layer w0.203: v1(30.429,94.488) v1(30.429,100) ; v1@31.995,104.267 49.124,104.267 53.035,100.355 84.633,100.355 89.891,105.613 v1(92.71,105.613) ; v1(42.393,89.002) 42.393,43.713 58.75,27.356 v1(65.1,27.356) ; 67.31,36.017 70.231,38.938 70.231,42.24 70.714,42.723 70.714,47.473 R6.2@69.139,49.047 ; v1(129.184,115.595) 151.994,115.595 154.026,117.627 155.905,117.627 P1.5@157.251,116.281
USB-D0: P3.1 U7.25 | length 26.4
  Top Layer w0.203: U7.25@33.745,28.599 36.628,28.599 41.294,33.266 41.294,45.269 P3.1@37.821,48.743
USB-D1: U2.33 U7.24 | length 63
  Top Layer w0.203: 55.347,72.068 55.347,72.121 60.24,77.014 U2.33@62.316,77.014
  Top Layer w0.254: U7.24@35.473,26.795 35.537,26.859 36.312,26.859 55.296,45.843 55.296,72.018 55.347,72.068
USB-D2: U2.34 U7.23 | length 64
  Top Layer w0.203: 55.804,71.823 55.829,71.849 55.829,71.957 60.386,76.514 U2.34@62.308,76.514 ; U2.34@62.316,76.506 U2.34@62.316,76.514
  Top Layer w0.254: U7.23@35.473,25.995 35.537,26.059 36.312,26.059 37.862,27.609 39.119,27.609 55.753,44.242 55.753,45.582 55.804,45.632 55.804,71.823
USB-D3: U2.35 U7.22 | length 64.1
  Top Layer w0.254: U7.22@35.473,25.195 37.424,25.195 56.261,44.032 56.261,45.371 56.312,45.422 56.312,71.757 60.569,76.014 U2.35@62.316,76.014
USB-D4: U2.36 U7.21 | length 64.2
  Top Layer w0.203: 56.769,43.967 56.794,43.993 56.794,71.557 60.751,75.514 U2.36@62.316,75.514
  Top Layer w0.254: U7.21@35.473,24.395 37.343,24.395 56.769,43.822 56.769,43.967
USB-D5: U2.37 U7.20 | length 64.4
  Top Layer w0.203: U7.20@35.473,23.595 37.225,23.595 57.252,43.622 57.252,71.368 60.898,75.014 U2.37@62.316,75.014
USB-D6: U2.39 U7.19 | length 64.3
  Top Layer w0.203: U7.19@35.473,22.795 37.072,22.795 57.709,43.432 57.709,71.178 60.544,74.014 U2.39@62.316,74.014
USB-D7: U2.40 U7.18 | length 64.4
  Top Layer w0.203: U7.18@35.473,21.995 36.919,21.995 58.166,43.243 58.166,70.989 60.691,73.514 U2.40@62.316,73.514
USB-RD: U2.42 U7.16 | length 66.9
  Top Layer w0.203: U7.16@33.745,19.517 33.754,19.517 33.859,19.412 35.628,19.412 59.08,42.864 59.08,70.61 60.984,72.514 U2.42@62.316,72.514
USB-RXF: U2.51 U7.12 | length 69.7
  Top Layer w0.203: 60.935,63.843 60.91,63.867 60.91,67.895 61.029,68.014 U2.51@62.316,68.014
  Top Layer w0.254: U7.12@30.545,19.517 30.609,19.453 30.609,18.678 32.468,16.818 35.657,16.818 60.935,42.096 60.935,63.843
USB-TXE: U2.44 U7.14 | length 69.9
  Top Layer w0.203: U7.14@32.145,19.517 32.145,18.742 33.129,17.758 35.267,17.758 59.995,42.485 59.995,70.231 60.964,71.201 61.259,71.495 62.297,71.495 U2.44@62.316,71.514
USB-WR: U2.43 U7.15 | length 68.9
  Top Layer w0.203: U7.15@32.945,19.517 32.945,18.742 33.471,18.215 35.078,18.215 59.538,42.675 59.538,70.421 61.112,71.995 62.297,71.995 U2.43@62.316,72.014
USB_VCC: C32.1 C33.1 C34.1 L2.2 L4.1 R32.1 R40.2 R47.2 U7.3 U7.26 U8.8 | length 56.8
  Top Layer w0.203: L4.1@20.269,24.943 L4.1@20.295,24.968 ; L2.2@20.295,39.802 20.422,39.802 22.149,38.075 22.149,36.436 ; R40.2@24.079,32.766 23.952,32.766 22.911,33.807 C32.1@20.422,33.807 ; U7.3@26.391,25.195 26.352,25.234 24.143,25.234 v1(24.105,25.273) 24.027,25.195 20.522,25.195 L4.1@20.295,24.968 ; v1@26.899,46.66 26.018,45.779 26.018,41.369 26.137,41.25 U8.8@26.962,41.25 ; U8.8@27.457,41.25 U8.8@26.962,41.25 ; v1(31.418,22.96) 33.649,25.19 33.649,27.121 32.945,27.824 U7.26@32.945,28.599 ; L4.1@20.295,24.968 C32.1@20.295,33.807 C32.1@20.422,33.807 ; C32.1@20.422,33.807 20.955,34.341 20.955,35.242 22.149,36.436 ; 22.149,36.436 24.424,38.712 24.424,38.759 26.915,41.25 U8.8@26.962,41.25
  Bottom Layer w0.203: v1(24.105,25.273) 27.276,22.101 29.386,22.101 30.297,23.012 R32.1@31.471,23.012
  other v1: 26.645,46.482
pads on no net: J1. J2.1 J2.4 J2.6 J2.7 J2.8 J2.9 J3.4 J3.9 J3.11 J3.12 J3.15 J3.BO1 J3.BO2 P1.6 P1.7 P1.8 P5.2 P5.3 P5.5 P8.2 P8.3 P8.5 PS2.2 PS2.6 SW1.5 SW1.6 U1.2 U1.9 U1.12 U1.13 U1.14 U1.15 U1.16 U3.16 U3.22 U5.7 U6.0 U7.0 U8.6 U8.7 U9.7 U11.7 U11.8 U11.9 U11.10

## Keep-outs
Keep-Out Layer:
  lines w0.203: -0.127,0.254 159.873,0.254 ; 0,0 0,147 160,147 160,0

## Other copper
Top Layer:
  rectangle net 3.3V: 72.949,26.416 79.502,31.293
Bottom Layer:
  rectangle net GND: 96.114,1.727 128.803,8.484
  rectangle net 3.3V: 76.556,28.346 79.502,31.42

## Silkscreen, mask and mechanical layers (free items; w line width, h text height)
Top Overlay:
  drawing of 15 lines, arcs and shapes, not listed

## Text inside footprints (layer, text, board x,y; h text height)
J2: Top Overlay "6" at 7.439,58.997 h1.5 r90; Top Overlay "9" at 7.439,67.307 h1.5 r90; Top Overlay "5" at 16.839,68.692 h1.5 r90; Top Overlay "1" at 16.839,57.862 h1.5 r90
J3: Top Overlay "10" at 12.5,100.677 h1.02 r90; Top Overlay "15" at 10.06,101.737 h1.02 r90; Top Overlay "5" at 15.15,102.497 h1.02 r90; Top Overlay "1" at 15.15,88.927 h1.02 r90; Top Overlay "6" at 12.61,87.477 h1.02 r90; Top Overlay "11" at 10.13,87.727 h1.02 r90
P1: Top Overlay "2" at 155.219,108.661 h1.27 r90; Top Overlay "1" at 157.759,109.169 h1.27 r90; Top Overlay "9" at 157.759,122.885 h1.27 r90; Top Overlay "10" at 155.219,122.885 h1.27 r90